# Altium PCB Arduino.pcbdoc
Units mil, origin at the board's own origin, x right, y up, seen from the top; angles counter-clockwise.
Board outline 960 x 1720 mil, 2 copper layers (Top Layer, Bottom Layer); 31 components, 0 nets, 149 pads, 30 vias.
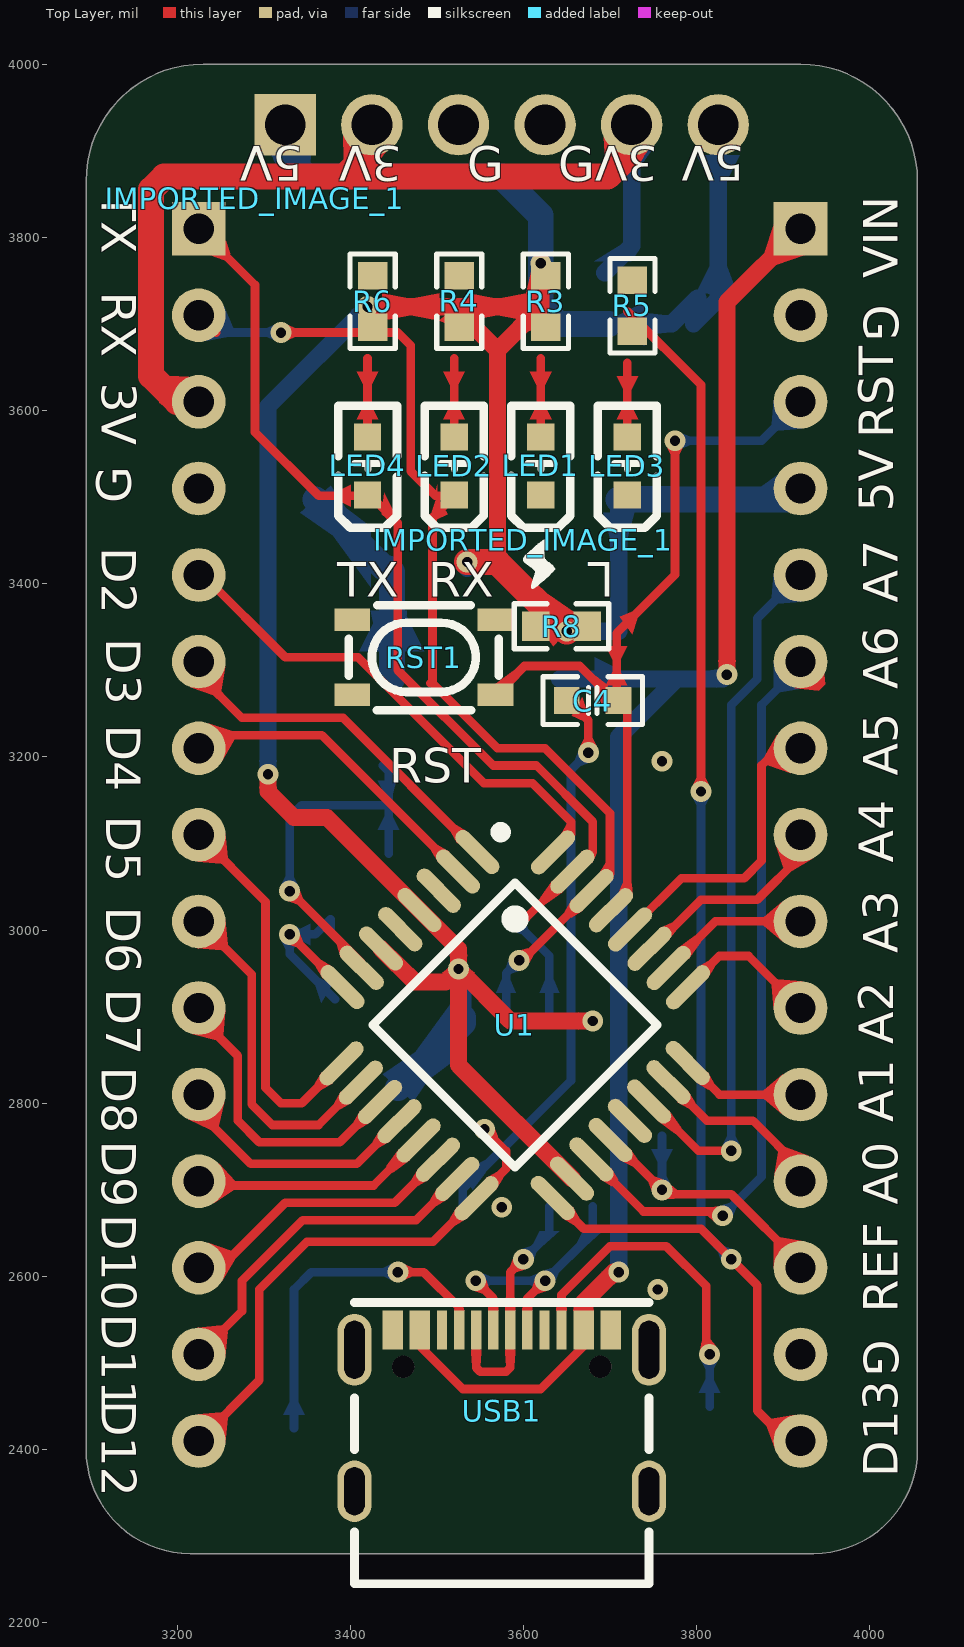
[diagram p0: Top Layer view]
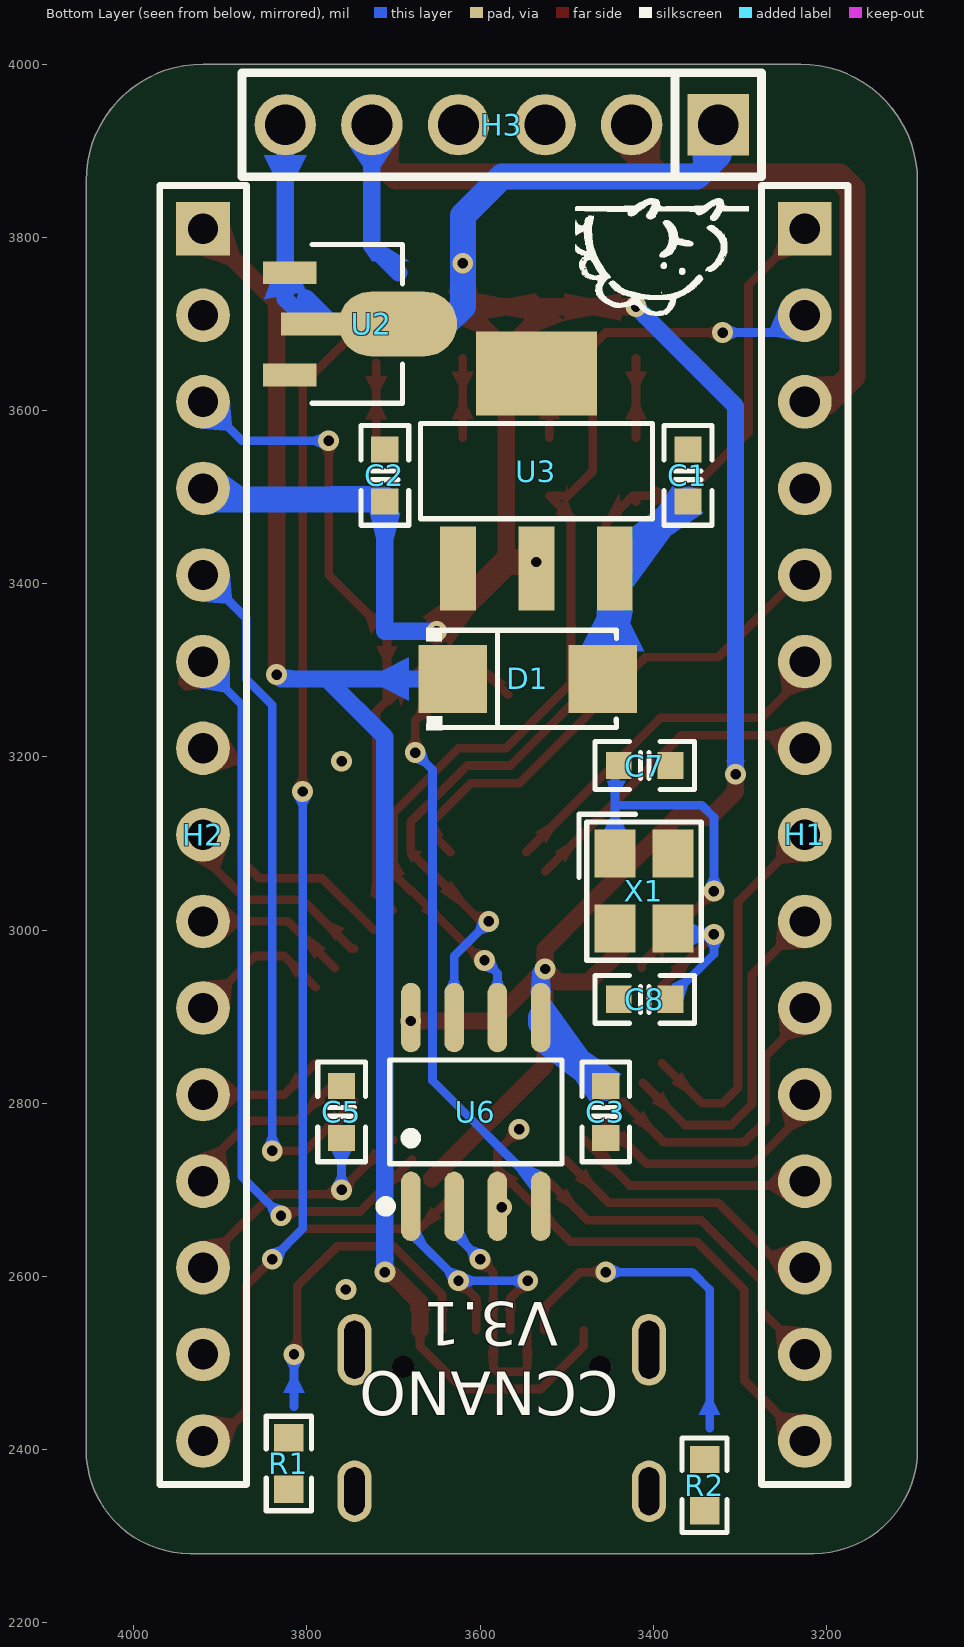
[diagram p1: Bottom Layer view, seen from below]

## Layer stack, top to bottom
Top Solder: solder mask 0.4, Solder Resist, Dk 3.5
Top Layer: signal copper 1.4
Dielectric 1: dielectric 12.6, FR-4, Dk 4.8
Bottom Layer: signal copper 1.4
Bottom Solder: solder mask 0.4, Solder Resist, Dk 3.5

## Board outline
3095,2400 3095,3865 cw(c3230,3865) 3230,4000 3920,4000 cw(c3920,3865) 4055,3865 4055,2400 cw(c3935,2400) 3935,2280 3215,2280 cw(c3215,2400)

## Design rules (kind name [scope] priority, off if disabled: settings)
Clearance [All] p1: gap=10 ignorepadtopadclearanceinfootprint=FALSE except(0: Arc-Hole Track-Hole SMDPad-Hole THPad-Hole Via-Hole Fill-Hole Poly-Hole Region-Hole Text-Hole)
PolygonConnect [All] p1: connectstyle=Relief reliefconductorwidth=10 reliefentries=4 polygonreliefangle="90 Angle" airgapwidth=10
RoutingVias [All] p1: holewidth=28 width=50 viastyle="Through Hole" minholewidth=28 minwidth=50 maxholewidth=28 maxwidth=50
SolderMaskExpansion [All] p1: expansion=4 istentingtop=FALSE
Width [All] p1: maxlimit=10 minlimit=10 preferedwidth=10
30 further rules are at their usual default settings.

## Components (designator, comment, footprint, x,y, rotation, side; value= is the part's Value field where it differs from the comment)
C1 "10uF" C0603 3360,3525 r90 bottom
C2 "22uF" C0603 3710,3525 r90 bottom
C3 "100nF" C0603 3455,2790 r90 bottom
C4 "100nF" C0603 3680,3265 r180 top
C5 "100nF" C0603 3760,2790 r270 bottom
C7 "22pF" C0603 3410,3190 r180 bottom
C8 "22pF" C0603 3410,2920 r0 bottom
D1 "SS36" SMA_L4.3-W2.6-LS5.2-RD 3545,3290 r180 bottom
H1 "Header-Male-2.54_1x15" HDR-TH_15P-P2.54-V 3225,3110 r90 bottom
H2 "Header-Male-2.54_1x15" HDR-TH_15P-P2.54-V 3920,3110 r90 bottom
H3 "Z-211-0611-0021-001" HDR-TH_6P-P2.54-V_Z-211-0611-0021-001 3575,3930 r0 bottom
IMPORTED_IMAGE_1 "Comment" IMPORTED_IMAGE 3599.64,3450.86 r0 top (schematic designator IMPORTED_IMAGE)
IMPORTED_IMAGE_1 "Comment" IMPORTED_IMAGE 3290,3845 r0 top (schematic designator IMPORTED_IMAGE)
LED1 "Power" LED0603-R-RD 3620,3535 r90 top
LED2 "RX" LED0603-R-RD 3520,3535 r90 top
LED3 "D13" LED0603-R-RD 3720,3535 r90 top
LED4 "TX" LED0603-R-RD 3420,3535 r90 top
R1 "5.1K" R0603 3815,2420 r270 bottom
R2 "5.1K" R0603 3335,2395 r270 bottom
R3 "1K" R0603 3620,3690 r90 top
R4 "1K" R0603 3520,3690 r90 top
R5 "1K" R0603 3720,3685 r90 top
R6 "1K" R0603 3420,3690 r90 top
R8 "1K" R0603 3680,3345 r180 top
RST1 "SKRPACE010" KEY-SMD_4P-L4.2-W3.2-P2.20-LS4.6 3485,3315 r0 top
U1 "ATMEGA328P-AU" TQFP-32_L7.0-W7.0-P0.80-LS9.0-BL 3590,2890 r225 top
U2 "HT7333-3" SOT-89-3_L4.5-W2.5-P1.50-LS4.2-BR 3745,3700 r0 bottom
U3 "AMS1117-5.0" SOT-223_L6.5-W3.5-P2.30-LS7.0-BR 3535,3530 r90 bottom
U6 "CH340N" SOP-8_L5.0-W4.0-P1.27-LS6.0-BL 3605,2790 r0 bottom
USB1 "TYPE-C16PIN" USB-C-SMD_TYPE-C16PIN 3575,2445 r0 top
X1 "16MHz" OSC-SMD_4P-L3.2-W2.5-BL 3410.8,3045 r90 bottom

## Footprints (in the part's own frame and the unit in brackets; to place one, negate y for a bottom-side part, rotate by r counter-clockwise, add the part's x,y. Pads: shape width x height; smd on the part's side, far side on the other; paste and mask are expansions set on the pad)
C0603 [mm]
  rect 0.76x0.8 smd: 1(-0.76,0) 2(0.76,0)
  silkscreen extent -1.46,-0.7 1.46,0.7, body extent -0.87,-0.48 0.87,0.48, height 0.87
HDR-TH_6P-P2.54-V_Z-211-0611-0021-001 [mm]
  rect 1.8x1.8 hole 1.2: 1(-6.35,0)
  round 1.8 hole 1.2: 2(-3.81,0) 3(-1.27,0) 4(1.27,0) 5(3.81,0) 6(6.35,0)
  silkscreen extent -7.62,-1.52 7.62,1.52
HDR-TH_15P-P2.54-V [mil]
  rect 62x62 hole 35: 1(700,0)
  round 62 hole 35: 2(600,0) 3(500,0) 4(400,0) 5(300,0) 6(200,0) 7(100,0) 8(0,0) 9(-100,0) 10(-200,0) 11(-300,0) 12(-400,0) 13(-500,0) 14(-600,0) 15(-700,0)
  silkscreen extent -750,-50 750,50
IMPORTED_IMAGE [mil]
  silkscreen extent 0,-57 37,0
KEY-SMD_4P-L4.2-W3.2-P2.20-LS4.6 [mm]
  rect 1.05x0.65 smd: 1(-2.1,1.1) 2(2.1,1.1) 3(-2.1,-1.1) 4(2.1,-1.1)
  silkscreen extent -2.2,-1.55 2.2,1.52
LED0603-R-RD [mm]
  rect 0.8x0.8 smd: 1(0.876,0) 2(-0.826,0)
  silkscreen extent -1.79,-0.86 1.79,0.86, body extent -0.81,-0.4 0.81,0.4, height 0.6
OSC-SMD_4P-L3.2-W2.5-BL [mm]
  rect 1.4x1.2 smd: 1(1.1,0.85) 2(-1.1,0.85) 3(-1.1,-0.85) 4(1.1,-0.85)
  silkscreen extent -2.03,-1.68 2.26,1.91
R0603 [mil]
  rect 31.75x34.02 smd: 1(6.36,-5.87) 2(65.67,-5.87)
  silkscreen extent -19,-32 91,20, body extent 6,-22 74,12, height 22
SMA_L4.3-W2.6-LS5.2-RD [mm]
  rect 2x2 smd: 1(-2.2,0) 2(2.2,0)
  silkscreen extent -2.98,-1.5 2.6,1.5
SOP-8_L5.0-W4.0-P1.27-LS6.0-BL [mil]
  oval 22.6x80.14 smd: 1(75,108.97) 2(25,108.97) 3(-25,108.97) 4(-75,108.97) 5(-75,-108.97) 6(-25,-108.97) 7(25,-108.97) 8(75,-108.97)
  silkscreen extent -99,-60 110,115
SOT-89-3_L4.5-W2.5-P1.50-LS4.2-BR [mil]
  rect 62.01x26.46 smd: 1(74.84,-59.04) 3(74.84,59.07)
  oval 0x60 smd: 2(-115,-50)
  oval 136.9x74.8 smd: 2(-50,0)
  rect 80x26.46 smd: 2(45,0)
  silkscreen extent -55,-92 49,92
SOT-223_L6.5-W3.5-P2.30-LS7.0-BR [mm]
  rect 2.465x1.05 smd: 1(-2.857,2.3) 2(-2.857,0) 3(-2.857,-2.3)
  rect 2.465x3.54 smd: 4(2.857,0)
  silkscreen extent -1.4,-3.4 1.4,3.4
TQFP-32_L7.0-W7.0-P0.80-LS9.0-BL [mm]
  oval 0.45x1.65 smd: 1(-2.817,-4.369) 2(-2.017,-4.369) 3(-1.217,-4.369) 4(-0.417,-4.369) 5(0.381,-4.369) 6(1.181,-4.369) 7(1.981,-4.369) 8(2.781,-4.369) 17(2.791,4.369) 18(1.991,4.369) 19(1.191,4.369) 20(0.391,4.369) 21(-0.406,4.369) 22(-1.206,4.369) 23(-2.007,4.369) 24(-2.807,4.369)
  oval 1.65x0.45 smd: 9(4.382,-2.804) 10(4.382,-2.004) 11(4.382,-1.204) 12(4.382,-0.404) 13(4.382,0.394) 14(4.382,1.194) 15(4.382,1.994) 16(4.382,2.794) 25(-4.381,2.804) 26(-4.382,2.004) 27(-4.382,1.204) 28(-4.381,0.404) 29(-4.382,-0.394) 30(-4.381,-1.194) 31(-4.381,-1.994) 32(-4.381,-2.794)
  silkscreen extent -3.86,-4.45 2.94,2.95
USB-C-SMD_TYPE-C16PIN [mm]
  oval 1x2.1 hole 0.6 slot 1.7 at 90 deg: 1(-4.32,1.787) 2(4.32,1.787)
  oval 1x1.8 hole 0.6 slot 1.4 at 90 deg: 3(-4.32,-2.362) 4(4.32,-2.362)
  rect 0.6x1.15 smd: A1B12(-3.2,2.362) A4B9(-2.4,2.362) B1A12(3.2,2.362) B4A9(2.4,2.362)
  rect 0.3x1.15 smd: A5(-1.25,2.362) A6(-0.25,2.362) A7(0.25,2.362) A8(-1.75,2.362) B5(1.75,2.362) B6(0.75,2.362) B7(-0.75,2.362) B8(1.25,2.362)
  round 0.65 hole 0.65 unplated: ""(-2.89,1.288) ""(2.89,1.288)
  silkscreen extent -4.32,-5.08 4.32,3.17

## Via types
v1: diameter 24, hole 12, Top Layer to Bottom Layer, 30 vias

## Nets (pads, with @x,y where several pads share a name; then routed paths per layer and width w, separated by ;. In a path a pad name is that pad's centre, name@x,y a point inside that pad or via, vN(x,y) a via of type N, cw(c..) or ccw(c..) an arc to the next point about the centre after c; other vN are vias at no path point)
pads on no net: C1.1 C1.2 C2.1 C2.2 C3.1 C3.2 C4.1 C4.2 C5.1 C5.2 C7.1 C7.2 C8.1 C8.2 D1.1 D1.2 H1.1 H1.2 H1.3 H1.4 H1.5 H1.6 H1.7 H1.8 H1.9 H1.10 H1.11 H1.12 H1.13 H1.14 H1.15 H2.1 H2.2 H2.3 H2.4 H2.5 H2.6 H2.7 H2.8 H2.9 H2.10 H2.11 H2.12 H2.13 H2.14 H2.15 H3.1 H3.2 H3.3 H3.4 H3.5 H3.6 LED1.1 LED1.2 LED2.1 LED2.2 LED3.1 LED3.2 LED4.1 LED4.2 R1.1 R1.2 R2.1 R2.2 R3.1 R3.2 R4.1 R4.2 R5.1 R5.2 R6.1 R6.2 R8.1 R8.2 RST1.1 RST1.2 RST1.3 RST1.4 U1.1 U1.2 U1.3 U1.4 U1.5 U1.6 U1.7 U1.8 U1.9 U1.10 U1.11 U1.12 U1.13 U1.14 U1.15 U1.16 U1.17 U1.18 U1.19 U1.20 U1.21 U1.22 U1.23 U1.24 U1.25 U1.26 U1.27 U1.28 U1.29 U1.30 U1.31 U1.32 U2.1 U2.2 U2.3 U3.1 U3.2 U3.3 U3.4 U6.1 U6.2 U6.3 U6.4 U6.5 U6.6 U6.7 U6.8 USB1. USB1.1 USB1.2 USB1.3 USB1.4 USB1.A1B12 USB1.A4B9 USB1.A5 USB1.A6 USB1.A7 USB1.A8 USB1.B1A12 USB1.B4A9 USB1.B5 USB1.B6 USB1.B7 USB1.B8 X1.1 X1.2 X1.3 X1.4
copper on no net: | length 23090.7
  Top Layer w10: 3225,2410 3295,2480 3295,2585 3350,2640 3495.6,2640 3545.8,2690.2 ; 3225,2510 3275,2560 3275,2595 3345,2665 3476,2665 3523.5,2712.5 ; 3225,2620 3225,2610 3250,2610 3325,2685 3451.5,2685 3501.3,2734.8 ; 3225,2710 3230,2705 3426.92,2705 3478.98,2757.06 ; 3225,2810 3225,2790 3285,2730 3407.5,2730 3456.8,2779.3 ; 3225,2910 3225,2900 3270,2855 3270,2780 3295,2755 3388,2755 3434.5,2801.5 ; 3225,3010 3286.1,2948.9 3286.1,2798.9 3310,2775 3363.4,2775 3412.2,2823.8 ; 3225,3110 3302.2,3032.8 3302.2,2817.8 3320,2800 3343.9,2800 3390,2846.1 ; 3225,3220 3225,3210 3240,3225 3367.3,3225 3524.5,3067.8 ; 3225,3310 3225,3295 3275,3245 3391.8,3245 3546.8,3090 ; 3225,3410 3230,3410 3325,3315 3409,3315 3554.56,3169.44 3610.56,3169.44 3655,3125 3655,3110.6 3634.2,3089.8 ; 3225,3710 3245,3690 ; 3225,3810 3290,3745 3290,3575 3363.5,3501.5 3420,3501.5 ; v1(3320,3690) 3455,3690 3470,3675 3470,3530 3498.5,3501.5 3520,3501.5 3495,3476.5 3495,3287.3 3492.7,3285 3495,3285 3570,3210 3625,3210 3700,3135 3700,3065 3680.2,3045.2 3678.7,3045.2 3598.5,2965 v1(3595,2965) ; v1(3330,2995) 3330.1,2995 3390.9,2934.2 ; v1(3330,3045) 3413.2,2961.8 3413.2,2956.5 ; 3420,3495 3420,3501.5 ; 3420,3568.5 3420,3660.3 ; v1(3455,2605) 3485,2605 3525.8,2564.2 3525.8,2538 ; 3480.5,2538 3480.5,2519.5 3530,2470 3620,2470 3669.5,2519.5 3669.5,2538 ; 3520,3568.5 3520,3660.3 ; v1(3545,2595) 3565.2,2574.8 3565.2,2538 ; 3545.5,2538 3545.5,2494.5 3550,2490 3580,2490 3584.8,2494.8 3584.8,2538 3584.8,2604.8 v1(3600,2620) ; v1(3555,2770) 3580,2745 3580,2724.4 3545.8,2690.2 ; 3567.7,3271.7 3601,3305 3665,3305 3705,3265 3707.6,3265 ; 3570,2714.4 3545.8,2690.2 ; v1(3590,3010) 3599,3010 3656.5,3067.5 3657.5,3067.5 3680,3090 3680,3125 3615,3190 3565,3190 3455,3300 3455,3470 3423.5,3501.5 3420,3501.5 ; 3604.5,2538 3604.5,2574.5 v1(3625,2595) ; 3620,3568.5 3620,3660.3 ; 3633.9,2690.7 3669.6,2655 3805,2655 3870,2590 3870,2445 3905,2410 3920,2410 ; 3643.9,2538 3643.9,2578.9 3700,2635 3765,2635 3811.1,2588.9 v1@3811.1,2507 ; 3652.4,3265 3675,3242.4 v1(3675,3205) ; 3678.5,2735.2 3738.7,2675 3830,2675 v1(3830,2670) ; 3700.7,2757.5 3702.5,2757.5 v1(3760,2700) 3765,2695 3840,2695 3920,2615 3920,2610 ; 3701,3022.9 3720,3041.9 3720,3252.6 3707.6,3265 ; 3720,3568.5 3720,3655.3 ; 3720,3714.7 3805,3629.7 v1(3805,3160) ; 3723.2,3000.7 3782.5,3060 3855,3060 3875,3080 3875,3190 3895,3210 3920,3210 ; 3745.2,2802 3802.2,2745 v1(3840,2745) ; 3745.5,2978.5 3748.5,2978.5 3805,3035 3870,3035 3920,3085 3920,3110 ; 3767.5,2824.2 3811.7,2780 3865,2780 3920,2725 3920,2710 ; 3767.8,2956.2 3821.6,3010 3920,3010 ; v1(3775,3565) 3775,3410.3 3709.7,3345 3707.6,3342.9 3707.6,3265 ; 3789.8,2846.5 3826.3,2810 3920,2810 ; 3790,2933.9 3826.1,2970 3860,2970 3920,2910
  Top Layer w20: v1(3305,3180) 3305,3160 3335,3130 3373.2,3130 3480,3023.2 3525,2978.2 v1(3525,2955) ; v1@3420,3719.7 3520,3719.7 ; 3435.5,2978.7 3475,2940 3510,2940 v1(3525,2955) ; v1(3535,3425) 3570,3425 3570,3657.5 ; v1(3620,3770) 3620,3719.7 ; 3656.2,2712.9 3525,2844.1 v1(3525,2955) ; 3669.5,2538 3669.5,2570.4 3704.1,2605 v1(3710,2605) ; v1(3680,2895) 3585,2895 v1(3525,2955) ; v1(3835,3295) 3835,3725 3920,3810 ; 3520,3719.7 3570,3669.7 ; 3520,3719.7 3620,3719.7 ; 3570,3657.5 3570,3669.7 ; 3570,3657.5 3570,3669.7 ; 3570,3669.7 3620,3719.7
  Top Layer w30: 3225,3610 3200,3610 3170,3640 3170,3855 3185,3870 3697.11,3870 3725,3897.89 3725,3930 ; 3392.82,3870 3425,3902.18 3425,3930 ; v1(3535,3425) 3570,3425 v1(3650,3345) v1@3650.3,3345
  Bottom Layer w10: 3225,3710 3245,3690 v1(3320,3690) ; v1(3330,3045) 3330,3130 3344.1,3144.1 3444.3,3144.1 ; 3335,2424.7 3335,2585 3355,2605 v1(3455,2605) ; 3377.3,3001.7 3377.3,3012.7 3359.6,2995 v1(3330,2995) 3330,2972.4 3382.4,2920 ; 3437.6,3190 3444.3,3183.3 3444.3,3088.3 ; 3530,2681 3530,2701.2 3655,2826.2 3655,3185 v1(3675,3205) ; v1(3545,2595) v1(3625,2595) 3680,2650 3680,2681 ; 3580,2899 3580,2950 v1(3595,2965) ; v1(3590,3010) 3630,2970 3630,2899 ; v1(3600,2620) 3630,2650 3630,2681 ; v1(3760,2700) 3760,2762.4 ; v1(3775,3565) 3875,3565 3920,3610 ; v1(3805,3160) 3805,2655 v1(3840,2620) ; 3815,2449.7 v1(3815,2510) ; v1(3830,2670) 3875,2715 3875,3260 3920,3305 3920,3310 ; v1(3840,2745) 3840,3260 3870,3290 3870,3360 3920,3410
  Bottom Layer w20: v1(3305,3180) 3305,3605 v1(3420,3720) ; v1(3525,2955) 3530,2950 3530,2899 ; v1@3535,3417.5 v1(3535,3425) ; 3641.9,3290 3830,3290 v1(3835,3295) ; v1(3650,3345) 3710,3345 3710,3497.4 ; 3693.8,3759.1 3725,3790.3 3725,3930 ; 3698.8,3700 3771.3,3700 3801.3,3730 ; v1(3710,2605) 3710,3223.06 3776.94,3290 3811.16,3290 ; 3796.3,3700 3825,3728.7 3825,3930
  Bottom Layer w30: 3325,3930 3325,3895 3350,3870 3575,3870 3620,3825 v1(3620,3770) 3620,3720 3640,3700 3698.8,3700 ; 3360,3497.4 3439.9,3417.5 3444.4,3417.5 3448.1,3413.8 3448.1,3290 ; 3455,2817.6 3530,2892.6 3530,2899 ; 3710,3497.4 3907.4,3497.4 3920,3510
  other v1: 3755,2585 3575,2680 3760,3195

## Other copper
Top Layer:
  region: 3600.75,2608.02 3588.02,2620.75 3584.91,2611.98 3591.98,2604.91
  region: 3578.9,2560.6 3590.7,2560.6 3589.84,2575.6 3579.84,2575.6
  region: 3625.75,2583.02 3613.02,2595.75 3609.91,2586.98 3616.98,2579.91
  region: 3598.6,2560.6 3610.4,2560.6 3609.52,2574.52 3599.52,2574.52
  region: 3556.98,2595.75 3544.25,2583.02 3553.02,2579.91 3560.09,2586.98
  region: 3559.2,2560.6 3571.1,2560.6 3570.15,2574.85 3560.15,2574.85
  region: 3821.84,2519.86 3804.36,2515.56 3806.1,2524.64 3816.1,2527.09
  region: 3638,2560.6 3649.8,2560.6 3648.89,2575.6 3638.89,2575.6
  region: 3462.94,2596 3462.94,2614 3471.34,2610 3471.34,2600
  region: 3519.88,2560.65 3531.69,2560.65 3530.78,2564.22 3520.78,2564.22
  region: 3707.67,2593.23 3698.61,2608.78 3690.68,2605.72 3701.09,2587.84
  region: 3657.7,2560.6 3681.3,2560.6 3679.49,2570.39 3659.49,2570.39
  region: 3914.1,2440.43 3890.54,2400.35 3881,2426.93 3886.23,2435.84
  region: 3656.87,2680.24 3644.36,2667.7 3657.7,2659.83 3664.76,2666.91
  region: 3825.2,2681 3819.69,2663.86 3812.84,2670 3816.05,2680
  region: 3701.42,2724.77 3688.9,2712.24 3702.24,2704.37 3709.3,2711.44
  region: 3672.06,2886 3672.06,2904 3663.66,2905 3663.66,2885
  region: 3536.98,2955.75 3524.25,2943.02 3529.48,2936.38 3543.62,2950.52
  region: 3666,3212.94 3684,3212.94 3680,3221.34 3670,3221.34
  region: 3668.19,3268.99 3655.79,3247.28 3669.42,3240.91 3674.56,3249.91
  region: 3551.4,2515.4 3539.6,2515.4 3540.47,2500.4 3550.47,2500.4
  region: 3590.7,2515.4 3578.9,2515.4 3579.8,2500.4 3589.8,2500.4
  region: 3551.4,2515.4 3539.6,2515.4 3540.47,2500.4 3550.47,2500.4
  region: 3590.7,2515.4 3578.9,2515.4 3579.8,2500.4 3589.8,2500.4
  region: 3255.43,3304.1 3215.35,3280.54 3241.93,3271 3250.84,3276.23
  region: 3536.35,3113.02 3523.85,3100.47 3515.94,3113.79 3523,3120.87
  region: 3252.43,3195.56 3235.9,3239.02 3262.55,3230 3266.35,3220
  region: 3514.09,3090.73 3501.55,3078.21 3493.68,3091.55 3500.75,3098.62
  region: 3766,3557.06 3784,3557.06 3780,3548.66 3770,3548.66
  region: 3711,3362.01 3725.53,3341.67 3731.24,3359.47 3725.35,3367.72
  region: 3726.48,3038.3 3708.97,3040.99 3715,3055.24 3725,3053.7
  region: 3924.53,2640.67 3889.01,2610.66 3888.93,2639 3896.59,2645.48
  region: 3770.31,2706.14 3764.8,2689 3773.95,2690 3777.16,2700
  region: 3296,3172.06 3314,3172.06 3315,3163.66 3295,3163.66
  region: 3252.28,2595.28 3236.2,2638.91 3262.69,2629.77 3266.5,2619.43
  region: 3490.83,2711.83 3478.28,2724.34 3470.42,2711 3477.5,2703.93
  region: 3223.06,2540.94 3255.94,2508.06 3258.38,2536.31 3251.31,2543.38
  region: 3513.09,2689.55 3500.56,2702.08 3492.68,2688.75 3499.75,2681.68
  region: 3223.06,2440.94 3255.94,2408.06 3258.38,2436.31 3251.31,2443.38
  region: 3535.37,2667.27 3522.84,2679.8 3514.97,2666.46 3522.04,2659.39
  region: 3768.18,2791.52 3755.65,2778.99 3775.25,2764.85 3782.32,2771.92
  region: 3929.65,2739.46 3889.57,2715.9 3894.16,2743.77 3903.07,2749
  region: 3790.45,2813.8 3777.92,2801.27 3791.25,2793.39 3798.33,2800.46
  region: 3908.8,3181.09 3892.72,3224.72 3878.5,3200.57 3882.31,3190.23
  region: 3889.06,2908.06 3921.94,2940.94 3893.69,2943.38 3886.62,2936.31
  region: 3813.02,2944.36 3800.47,2956.87 3813.8,2964.76 3820.88,2957.7
  region: 3934.72,3082.72 3891.09,3098.8 3900.23,3072.31 3910.57,3068.5
  region: 3767.52,2988.08 3756.87,3002.24 3771.15,3008.22 3777.22,3000.14
  region: 3255.83,2906.73 3217.9,2879.82 3245.28,2872.64 3253.56,2878.51
  region: 3424.08,2778.58 3411.53,2791.09 3403.68,2777.74 3410.76,2770.68
  region: 3223.06,2979.06 3255.94,3011.94 3258.38,2983.69 3251.31,2976.62
  region: 3401.79,2800.84 3389.27,2813.38 3381.38,2800.05 3388.44,2792.97
  region: 3223.06,3079.06 3255.94,3111.94 3258.38,3083.69 3251.31,3076.62
  region: 3379.53,2823.13 3366.98,2835.64 3359.12,2822.3 3366.21,2815.24
  region: 3248.11,2730.66 3242.61,2684.48 3266.31,2700 3267.5,2710
  region: 3468.54,2734.09 3456.01,2746.62 3441.87,2727.02 3448.94,2719.95
  region: 3441.45,3898.62 3391.81,3917.6 3392.42,3890.81 3423.11,3879.07
  region: 3213.8,3638.91 3197.72,3595.28 3179.69,3609.1 3191.11,3640.1
  region: 3743.6,3899.84 3692.75,3915.31 3694.69,3888.8 3727.22,3878.9
  region: 3256,3796.68 3238.32,3779 3254.23,3773.7 3261.3,3780.77
  region: 3400.5,3489 3400.5,3514 3385.5,3506.5 3385.5,3496.5
  region: 3659.41,3104.04 3642.37,3108.89 3650,3122.31 3660,3119.47
  region: 3666.91,3090.45 3679.44,3077.92 3683.54,3086.46 3676.46,3093.54
  region: 3439.5,3504.81 3436.4,3480 3450,3467.93 3451.58,3480.49
  region: 3703.88,3059.22 3687,3064.6 3695,3077.8 3705,3074.61
  region: 3512.71,3480 3500.5,3501.82 3494.05,3482.62 3499.12,3473.55
  region: 3516,2962.94 3534,2962.94 3535,2971.34 3515,2971.34
  region: 3525.75,2943.02 3513.02,2955.75 3506.38,2950.52 3520.52,2936.38
  region: 3341.98,3045.75 3329.25,3033.02 3338.02,3029.91 3345.09,3036.98
  region: 3404.15,2977.67 3388.89,2968.68 3384.45,2983.47 3393.35,2988.72
  region: 3341.97,2995.8 3329.3,2983.02 3338.08,2979.95 3345.12,2987.05
  region: 3380.5,2957.17 3368,2944.62 3360.09,2957.94 3367.15,2965.02
  region: 3254.8,2801.46 3212.8,2781.5 3238.32,2769.6 3247.91,2774.16
  region: 3446.34,2756.3 3433.82,2768.83 3425.93,2755.5 3433,2748.43
  region: 3566.98,2770.75 3554.25,2758.02 3563.02,2754.91 3570.09,2761.98
  region: 3568.77,2700.67 3556.26,2713.22 3569.61,2721.08 3576.67,2713.99
  region: 3568.77,2700.67 3556.26,2713.22 3566.47,2717.94 3573.53,2710.86
  region: 3516,2947.06 3534,2947.06 3535,2938.66 3515,2938.66
  region: 3723.15,2747.55 3711.72,2734.02 3725.65,2727.27 3732.13,2734.94
  region: 3760.75,2711.98 3748.02,2699.25 3744.91,2708.02 3751.98,2715.09
  region: 3899.5,2786.75 3899.5,2833.25 3877.8,2815 3877.8,2805
  region: 3812.72,2836.08 3800.21,2823.54 3813.55,2815.67 3820.62,2822.75
  region: 3899.5,2986.75 3899.5,3033.25 3877.8,3015 3877.8,3005
  region: 3778.21,2979.15 3790.74,2966.62 3804.88,2986.21 3797.81,2993.28
  region: 3606.72,2962.44 3596.07,2976.95 3605.18,2978.75 3611.16,2970.59
  region: 3668.29,3022.23 3655.78,3034.78 3647.88,3021.45 3654.95,3014.37
  region: 3600.74,3004.64 3593.97,3021.32 3603.1,3021.17 3607.18,3011.11
  region: 3646.03,3044.51 3633.5,3057.04 3619.36,3037.44 3626.44,3030.37
  region: 3542.94,3416 3542.94,3434 3551.34,3435 3551.34,3415
  region: 3634.47,3327.99 3666.22,3362.01 3628.58,3387.63 3608.1,3365.69
  region: 3567.99,3284.5 3588.3,3284.5 3602.56,3299.5 3588.42,3299.5
  region: 3691.81,3258.3 3697.16,3282.72 3684.06,3293.01 3681.52,3281.41
  region: 3707.5,3639.47 3732.5,3639.47 3725,3624.47 3715,3624.47
  region: 3707.5,3590 3732.5,3590 3725,3605 3715,3605
  region: 3796,3167.94 3814,3167.94 3810,3176.34 3800,3176.34
  region: 3737.01,3713.46 3716.77,3698.78 3734.49,3693.1 3742.69,3699.05
  region: 3602.99,3735.53 3637.01,3735.53 3630,3765.53 3610,3765.53
  region: 3327.94,3681 3327.94,3699 3336.34,3695 3336.34,3685
  region: 3500.5,3489 3500.5,3514 3498.5,3506.5 3498.5,3496.5
  region: 3826,3302.94 3844,3302.94 3845,3311.34 3825,3311.34
  region: 3924.35,3779 3889,3814.35 3878.39,3782.53 3892.53,3768.39
  region: 3695.06,3327.99 3720.06,3327.99 3712.56,3312.99 3702.56,3312.99
  region: 3695.06,3282.72 3720.06,3282.72 3712.56,3297.72 3702.56,3297.72
  region: 3637.01,3703.78 3602.99,3735.53 3591.46,3705.26 3606.09,3691.6
  region: 3537.01,3735.53 3502.99,3703.78 3533.91,3691.6 3548.54,3705.26
  region: 3537.01,3735.53 3537.01,3703.78 3567.01,3709.66 3567.01,3729.66
  region: 3602.99,3703.78 3602.99,3735.53 3572.99,3729.66 3572.99,3709.66
  region: 3437.01,3735.53 3437.01,3703.78 3467.01,3709.66 3467.01,3729.66
  region: 3502.99,3703.78 3502.99,3735.53 3472.99,3729.66 3472.99,3709.66
  region: 3607.5,3644.47 3632.5,3644.47 3625,3629.47 3615,3629.47
  region: 3607.5,3590 3632.5,3590 3625,3605 3615,3605
  region: 3507.5,3644.47 3532.5,3644.47 3525,3629.47 3515,3629.47
  region: 3507.5,3590 3532.5,3590 3525,3605 3515,3605
  region: 3407.5,3644.47 3432.5,3644.47 3425,3629.47 3415,3629.47
  region: 3407.5,3590 3432.5,3590 3425,3605 3415,3605
  region: 3913.06,3279.06 3945.94,3311.94 3948.38,3283.69 3941.31,3276.62
Bottom Layer:
  region: 3675.75,3193.02 3663.02,3205.75 3659.91,3196.98 3666.98,3189.91
  region: 3527.53,2720.82 3541.3,2699.96 3556.3,2720.39 3556.3,2734.53
  region: 3641.3,2652.06 3618.7,2652.42 3611.95,2639.02 3621.28,2634.21
  region: 3611.98,2619.25 3599.25,2631.98 3608.02,2635.09 3615.09,2628.02
  region: 3617.06,2586 3617.06,2604 3608.66,2600 3608.66,2590
  region: 3552.94,2586 3552.94,2604 3561.34,2600 3561.34,2590
  region: 3691.3,2652.11 3668.7,2652.42 3661.95,2639.02 3671.28,2634.21
  region: 3636.98,2594.25 3624.25,2606.98 3633.02,2610.09 3640.09,2603.02
  region: 3347.5,2440.53 3322.5,2440.53 3330,2455.53 3340,2455.53
  region: 3447.06,2596 3447.06,2614 3438.66,2610 3438.66,2600
  region: 3701,2612.94 3719,2612.94 3720,2621.34 3700,2621.34
  region: 3841.98,2669.25 3829.25,2681.98 3838.02,2685.09 3845.09,2678.02
  region: 3924.53,3279.33 3889.01,3309.34 3888.93,3281 3896.59,3274.52
  region: 3541.3,2927.74 3518.7,2927.74 3520,2950 3540,2950
  region: 3518.86,2944.69 3536,2950.2 3540,2942.66 3520,2936.23
  region: 3437.3,2833.3 3472.7,2801.8 3498.09,2839.44 3475.64,2859.42
  region: 3532.56,2859.2 3518.7,2918.76 3473.7,2857.48 3473.7,2815.05
  region: 3591.3,2927.74 3568.7,2927.74 3575,2942.74 3585,2942.74
  region: 3595.75,2953.02 3583.02,2965.75 3579.91,2956.98 3586.98,2949.91
  region: 3641.3,2927.74 3618.7,2927.74 3625,2942.74 3635,2942.74
  region: 3601.98,3010.75 3589.25,2998.02 3598.02,2994.91 3605.09,3001.98
  region: 3296,3187.94 3314,3187.94 3315,3196.34 3295,3196.34
  region: 3420.75,3708.02 3408.02,3720.75 3401.38,3715.52 3415.52,3701.38
  region: 3751,2707.94 3769,2707.94 3765,2716.34 3755,2716.34
  region: 3747.5,2746.7 3772.5,2746.7 3765,2731.7 3755,2731.7
  region: 3827.5,2465.53 3802.5,2465.53 3810,2480.53 3820,2480.53
  region: 3806,2502.06 3824,2502.06 3820,2493.66 3810,2493.66
  region: 3840.75,2631.98 3828.02,2619.25 3824.91,2628.02 3831.98,2635.09
  region: 3796,3152.06 3814,3152.06 3810,3143.66 3800,3143.66
  region: 3831,2752.94 3849,2752.94 3845,2761.34 3835,2761.34
  region: 3356.49,3913.76 3304.95,3900.78 3319.83,3878.95 3353.73,3887.49
  region: 3681.99,3772.3 3724.8,3772.3 3732.07,3783.24 3710.86,3790.31
  region: 3751.57,3906.56 3698.43,3906.56 3715,3881.76 3735,3881.76
  region: 3800,3894.6 3850,3894.6 3835,3864.6 3815,3864.6
  region: 3800,3737.35 3849.24,3728.66 3835,3767.35 3815,3767.35
  region: 3734.9,3686.8 3734.9,3713.2 3764.9,3710 3764.9,3690
  region: 3739.47,3675 3739.47,3725 3709.47,3710 3709.47,3690
  region: 3692.3,3481.7 3727.7,3481.7 3720,3451.7 3700,3451.7
  region: 3657.94,3336 3657.94,3354 3666.34,3355 3666.34,3335
  region: 3907.34,3481.7 3893.5,3526.09 3875.03,3512.44 3884.38,3482.44
  region: 3727.7,3481.7 3727.7,3513.2 3772.7,3512.44 3772.7,3482.44
  region: 3377.7,3513.2 3342.3,3481.7 3380.64,3455.58 3403.09,3475.56
  region: 3423.8,3396.14 3423.8,3466 3378.8,3499.85 3378.8,3457.43
  region: 3410.64,3321.9 3485.64,3321.9 3463.14,3366.9 3433.14,3366.9
  region: 3465.1,3369 3423.8,3369 3433.14,3324 3463.14,3324
  region: 3682.15,3265 3682.15,3315 3712.15,3300 3712.15,3280
  region: 3830.2,3284 3824.69,3301.14 3816.23,3300 3822.66,3280
  region: 3889.06,3611.94 3921.94,3579.06 3893.69,3576.62 3886.62,3583.69
  region: 3782.94,3556 3782.94,3574 3791.34,3570 3791.34,3560
  region: 3254.07,3720.76 3232.04,3679.81 3259.47,3685 3264.86,3695
  region: 3312.06,3681 3312.06,3699 3303.66,3695 3303.66,3685
  region: 3889.06,3411.94 3921.94,3379.06 3893.69,3376.62 3886.62,3383.69
  region: 3366.7,2915.95 3379.02,2937.7 3365.41,2944.11 3360.29,2935.08
  region: 3321,2987.06 3339,2987.06 3335,2978.66 3325,2978.66
  region: 3353.71,2982.5 3353.71,3007.5 3338.71,3000 3338.71,2990
  region: 3337.94,2986 3337.94,3004 3346.34,3000 3346.34,2990
  region: 3431.8,3115.87 3456.8,3115.87 3449.3,3130.87 3439.3,3130.87
  region: 3431.8,3172.3 3453.3,3172.3 3449.3,3157.3 3439.3,3157.3
  region: 3321,3052.94 3339,3052.94 3335,3061.34 3325,3061.34

## Silkscreen, mask and mechanical layers (free items; w line width, h text height)
Top Overlay:
  text "5V" at 3345,3905 h40 r180
  text "3V" at 3459.67,3905 h40 r180
  text "3V" at 3755,3905 h40 r180
  text "5V" at 3855,3905 h40 r180
  text "G" at 3535.16,3864.99 h40
  text "G" at 3640,3865 h40
  text "TX" at 3113,3852 h40 r270
  text "VIN" at 4032,3753 h40 r90
  text "RX" at 3113,3737 h40 r270
  text "G" at 3993,3722 h40 r270
  text "3V" at 3113,3632 h40 r270
  text "RST" at 4027,3568 h40 r90
  text "G" at 3147,3493 h40 r90
  text "5V" at 4027,3483 h40 r90
  text "D2" at 3113,3442 h40 r270
  text "L" at 3705,3425 h40 r180
  text "TX" at 3385,3385 h40
  text "RX" at 3490,3385 h40
  text "A7" at 4032,3378 h40 r90
  text "D3" at 3118,3337 h40 r270
  text "A6" at 4032,3278 h40 r90
  text "D4" at 3118,3237 h40 r270
  text "A5" at 4032,3178 h40 r90
  text "RST" at 3445,3170 h40
  text "D5" at 3118,3132 h40 r270
  text "A4" at 4027,3078 h40 r90
  text "D6" at 3118,3027 h40 r270
  text "A3" at 4032,2973 h40 r90
  text "D7" at 3118,2932 h40 r270
  text "A2" at 4027,2868 h40 r90
  text "D8" at 3113,2842 h40 r270
  text "A1" at 4027,2778 h40 r90
  text "D9" at 3113,2757 h40 r270
  text "A0" at 4032,2683 h40 r90
  text "D10" at 3113,2672 h40 r270
  text "REF" at 4032,2558 h40 r90
  text "D11" at 3113,2557 h40 r270
  text "G" at 3993,2527 h40 r270
  text "D12" at 3113,2457 h40 r270
  text "D13" at 4032,2368 h40 r90
Bottom Overlay:
  text "V3.1" at 3510,2570 h50 r180
  text "CCNANO" at 3440,2490 h50 r180
Mechanical 1:
  lines w10: 3095,2400 ccw(c3215,2400) 3215,2280 3230,2280 3920,2280 3935,2280 ccw(c3935,2400) 4055,2400 4055,3800 4055,3865 ccw(c3920,3865) 3920,4000 3230,4000 ccw(c3230,3865) 3095,3865 3095,3800 3095,2400